# Altium PCB PCB2.PcbDoc
Units mm, origin at the board's own origin, x right, y up, seen from the top; angles counter-clockwise.
Board outline 56.01 x 15.24 mm, 2 copper layers (Top Layer, Bottom Layer); 6 components, 6 nets, 36 pads, 6 vias.
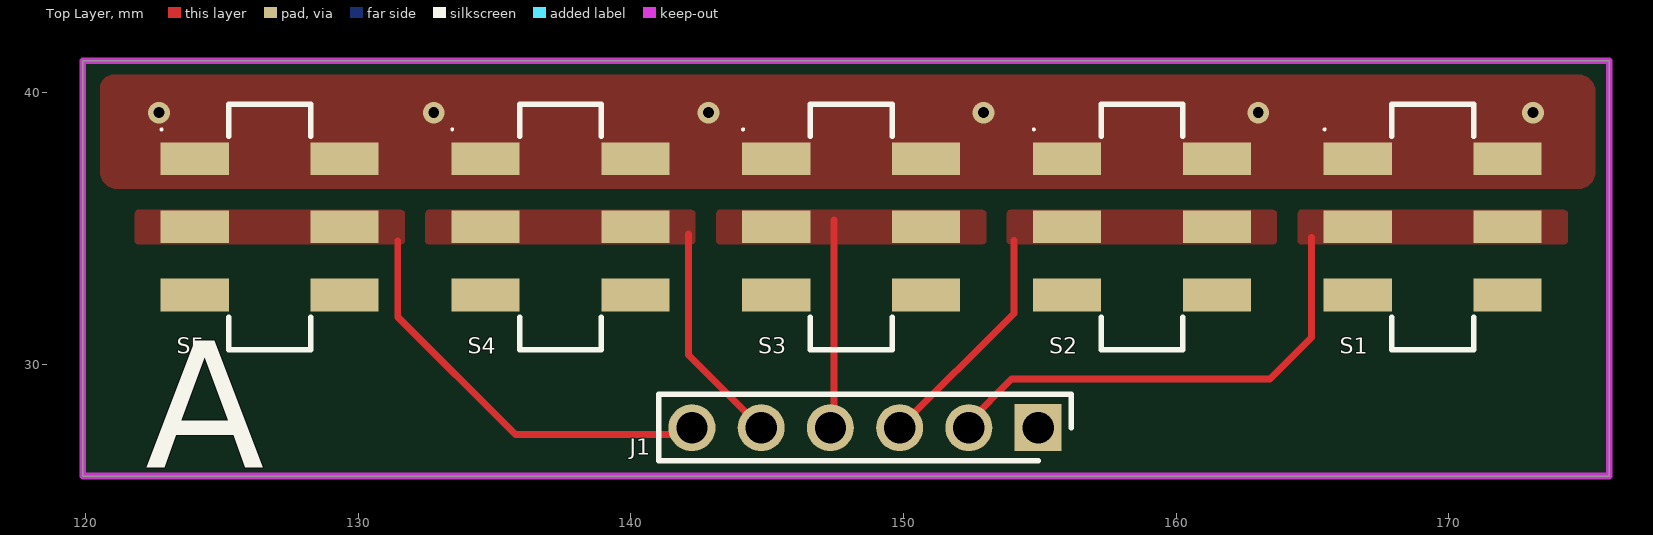
[diagram p0: Top Layer view]
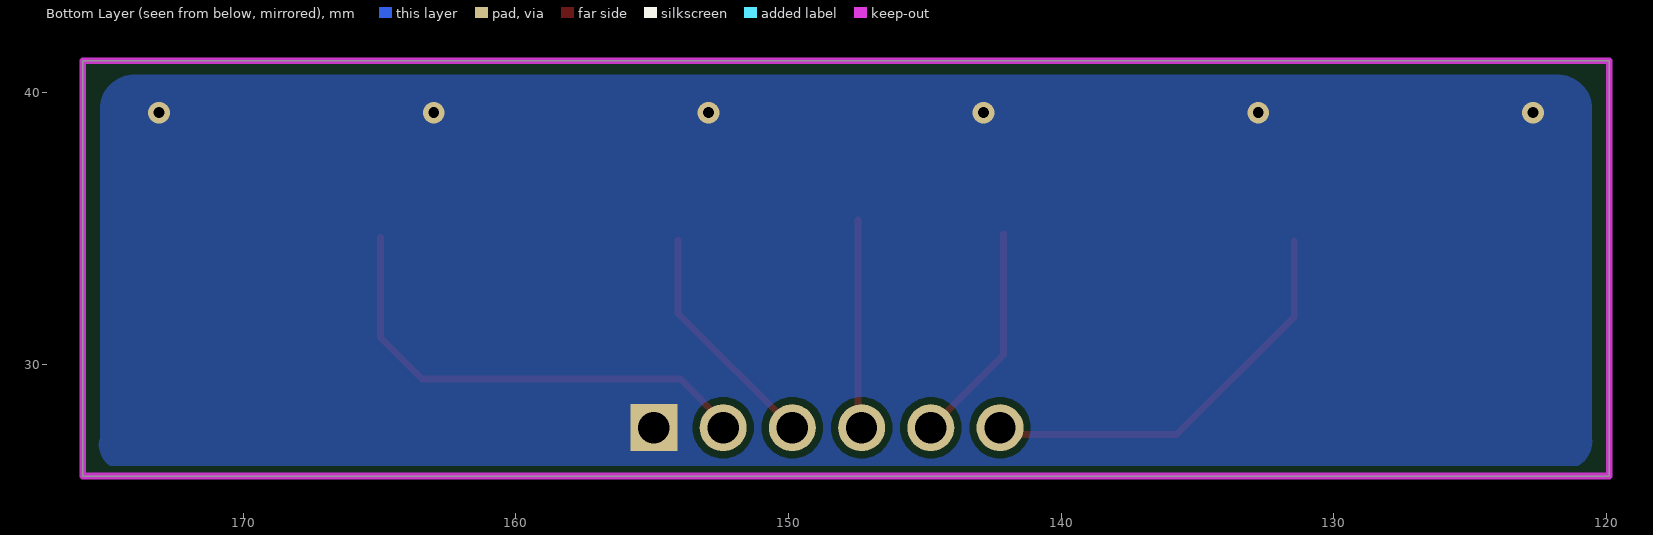
[diagram p1: Bottom Layer view, seen from below]
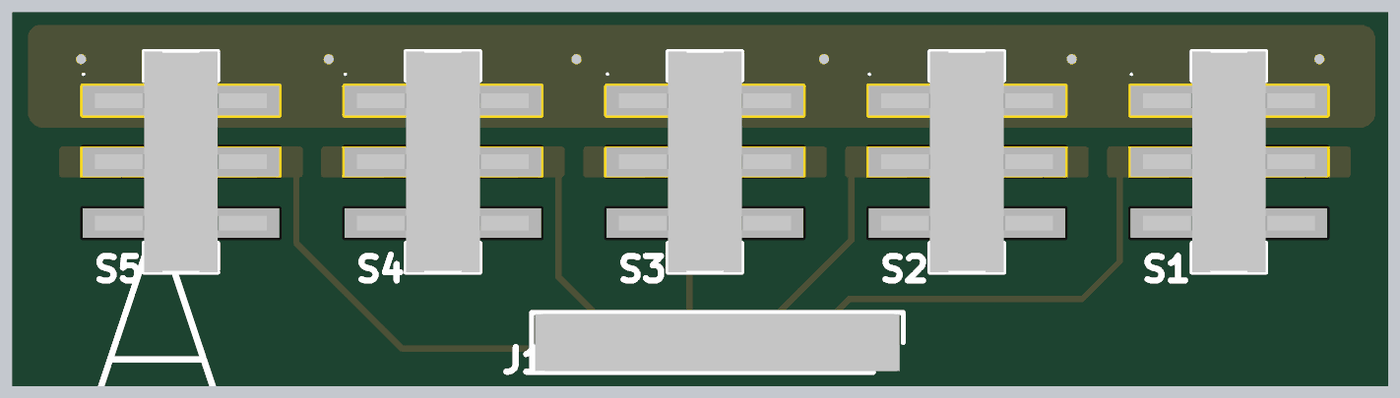
[diagram p2: 3D render of the assembled board from above, using the file's embedded part models]

## Layer stack, top to bottom
Top Solder: solder mask 0.0102, Solder Resist, Dk 3.5
Top Layer: signal copper 0.0356
Dielectric 1: dielectric 0.32, FR-4, Dk 4.8
Bottom Layer: signal copper 0.0356
Bottom Solder: solder mask 0.0102, Solder Resist, Dk 3.5

## Board outline
119.888,25.908 175.895,25.908 175.895,41.148 119.888,41.148

## Design rules (kind name [scope] priority, off if disabled: settings)
Clearance [All] p1: gap=0.254 ignorepadtopadclearanceinfootprint=TRUE except(0: Arc-Via Arc-Hole Track-Via Track-Hole SMDPad-Via SMDPad-Hole THPad-Hole Via-Via Via-Hole Fill-Hole Poly-Hole Region-Hole Text-Hole; 0.003: Arc-Arc Arc-Track Arc-SMDPad Arc-THPad Track-Track Track-SMDPad Track-THPad SMDPad-SMDPad SMDPad-THPad THPad-THPad)
PolygonConnect [All] p1: connectstyle=Direct reliefconductorwidth=0.254 reliefentries=4 polygonreliefangle="90 Angle" airgapwidth=0.254
RoutingVias [All] p1: holewidth=0.711 width=1.27 viastyle="Through Hole" minholewidth=0.711 minwidth=1.27 maxholewidth=0.711 maxwidth=1.27
SolderMaskExpansion [All] p1: expansion=0.102 istentingtop=FALSE
Width [All] p1: maxlimit=0.254 minlimit=0.254 preferedwidth=0.254
30 further rules are at their usual default settings.

## Components (designator, comment, footprint, x,y, rotation, side; value= is the part's Value field where it differs from the comment)
J1 "Male Header 6" "MALE HEADER 6" 154.94,27.686 r180 top
S1 "JS202011SCQN" DPDT 169.418,35.052 r270 top
S2 "JS202011SCQN" DPDT 158.75,35.052 r270 top
S3 "JS202011SCQN" DPDT 148.082,35.052 r270 top
S4 "JS202011SCQN" DPDT 137.414,35.052 r270 top
S5 "JS202011SCQN" DPDT 126.746,35.052 r270 top

## Footprints (in the part's own frame and the unit in brackets; to place one, negate y for a bottom-side part, rotate by r counter-clockwise, add the part's x,y. Pads: shape width x height; smd on the part's side, far side on the other; paste and mask are expansions set on the pad)
DPDT [mm]
  rect 1.2x2.5 smd: A1(0,2.75) A1(0,-2.75) A2(-2.5,2.75) A2(-2.5,-2.75) A3(2.5,2.75) A3(2.5,-2.75)
  silkscreen extent -4.5,-4 4.5,1.5, body extent -4.5,-3.5 4.5,3.5, height 5.65
"MALE HEADER 6" [mm]
  rect 1.725x1.725 hole 1.15: PIN1(0,0)
  round 1.725 hole 1.15: PIN2(2.54,0) PIN3(5.08,0) PIN4(7.62,0) PIN5(10.16,0) PIN6(12.7,0)
  silkscreen extent -1.21,-1.22 13.91,1.22, body extent -1.07,-1.17 13.77,1.17, height 10.37

## Part data
S1 S2 S3 S4 S5: "DEEP SWITCH 4 POSITIONS", Current Rating="300 mA", Manufacturer=C&K, Mouser Part Number=611-JS202011SCQN, Operating Temperature(max - min)=-20~70°C, Voltage Rating DC="30 VDC", ComponentLink1Description="Mouser Link", ComponentLink1URL=https://br.mouser.com/ProductDetail/CK/JS202011SCQN?qs=LgMIjt8LuD95JYWxZ7NvZA%3D%3D, ComponentLink2Description="Datasheet Link", ComponentLink2URL=https://www.mouser.com/datasheet/2/60/js-1841892.pdf, Library Control - Checked Footprint=Yes, Library Control - Checked Schematic=Yes, Library Control - Last Update=15/06/2021, Library Control - Person that Checked Footprint=Nikaum, Library Control - Person that Checked Schematic=Nikaum, Library Control - Person that did the Last Update Footprint=Nikaum, Library Control - Person that did the Last Update Schematic=Nikaum, Library Ref=Diversos, Part Number=JS202011SCQN, Supplier=Mouser, Switch Function="ON - ON"
J1: Library Control - Checked Footprint=Yes, Library Control - Checked Schematic=Yes, Library Control - Last Update=02/10/2022, Library Control - Person that Checked Footprint=Cage, Library Control - Person that Checked Schematic=Cage, Library Control - Person that did the Last Update Schematic=Cage, Library Control - Persont that did the Last Update Footprint=Cage, Library Ref=Header, Number of Contacts=6, System=Connector

## Via types
v1: diameter 0.8, hole 0.4, Top Layer to Bottom Layer, tented both sides, 6 vias

## Nets (pads, with @x,y where several pads share a name; then routed paths per layer and width w, separated by ;. In a path a pad name is that pad's centre, name@x,y a point inside that pad or via, vN(x,y) a via of type N, cw(c..) or ccw(c..) an arc to the next point about the centre after c; other vN are vias at no path point)
3.3V: J1.PIN1 S1.A2 S2.A2 S3.A2 S4.A2 S5.A2
  other v1: 122.682,39.243 132.766,39.243 142.85,39.243 152.933,39.243 163.017,39.243 173.101,39.243
POS1: J1.PIN2 S1.A1 | length 17.7
  Top Layer w0.254: J1.PIN2 152.4,27.893 153.971,29.464 163.449,29.464 164.973,30.988 164.973,34.671
POS2: J1.PIN3 S2.A1 | length 8.6
  Top Layer w0.254: J1.PIN3 154.051,31.877 154.051,34.562
POS3: J1.PIN4 S3.A1 | length 7.7
  Top Layer w0.254: J1.PIN4 147.447,27.813 147.447,35.306
POS4: J1.PIN5 S4.A1 | length 8.2
  Top Layer w0.254: 142.113,34.798 142.113,30.353 J1.PIN5
POS5: J1.PIN6 S5.A1 | length 15.5
  Top Layer w0.254: 131.445,34.544 131.445,31.75 135.763,27.432 141.986,27.432 J1.PIN6
pads on no net: S1.A3 S2.A3 S3.A3 S4.A3 S5.A3

## Polygon pours and split planes (outlines as drawn)
POS1 on Top Layer "POS1_L01_P005" (solid, pour order 5): 164.465,35.56 164.465,34.544 ccw(c164.592,34.544) 164.592,34.417 174.244,34.417 ccw(c174.244,34.544) 174.371,34.544 174.371,35.56 ccw(c174.244,35.56) 174.244,35.687 164.592,35.687 ccw(c164.592,35.56)
POS3 on Top Layer "POS3_L01_P004" (solid, pour order 4): 143.129,35.56 143.129,34.544 ccw(c143.256,34.544) 143.256,34.417 152.908,34.417 ccw(c152.908,34.544) 153.035,34.544 153.035,35.56 ccw(c152.908,35.56) 152.908,35.687 143.256,35.687 ccw(c143.256,35.56)
POS2 on Top Layer "POS2_L01_P003" (solid, pour order 3): 153.797,35.56 153.797,34.544 ccw(c153.924,34.544) 153.924,34.417 163.576,34.417 ccw(c163.576,34.544) 163.703,34.544 163.703,35.56 ccw(c163.576,35.56) 163.576,35.687 153.924,35.687 ccw(c153.924,35.56)
POS5 on Top Layer "POS5_L01_P002" (solid, pour order 2): 121.793,35.56 121.793,34.544 ccw(c121.92,34.544) 121.92,34.417 131.572,34.417 ccw(c131.572,34.544) 131.699,34.544 131.699,35.56 ccw(c131.572,35.56) 131.572,35.687 121.92,35.687 ccw(c121.92,35.56)
POS4 on Top Layer "POS4_L01_P001" (solid, pour order 1): 132.454,35.56 132.454,34.544 ccw(c132.581,34.544) 132.581,34.417 142.233,34.417 ccw(c142.233,34.544) 142.36,34.544 142.36,35.56 ccw(c142.233,35.56) 142.233,35.687 132.581,35.687 ccw(c132.581,35.56)
3.3V on Top Layer "3.3V_L01_P000" (solid, pour order 0): 120.523,40.132 120.523,37.084 ccw(c121.158,37.084) 121.158,36.449 174.752,36.449 ccw(c174.752,37.084) 175.387,37.084 175.387,40.005 ccw(c174.752,40.005) 174.752,40.64 121.031,40.64 ccw(c121.031,40.132)
3.3V on Bottom Layer "3.3V_L02_P007" (solid, pour order 7): 120.523,39.37 120.523,27.305 ccw(c121.539,27.178) 121.412,26.162 174.625,26.162 ccw(c174.369,27.052) 175.26,27.305 175.26,39.37 ccw(c173.99,39.37) 173.99,40.64 121.793,40.64 ccw(c121.793,39.37)

## Keep-outs
Keep-Out Layer:
  the board outline again, w0.254

## Silkscreen, mask and mechanical layers (free items; w line width, h text height)
Top Overlay:
  text "A" at 122.174,24.697 h8
BoardOutLine:
  the board outline again, w0.254